# EAGLE board Multiple - Automatic Battery Charger (EAGLE 6.4)
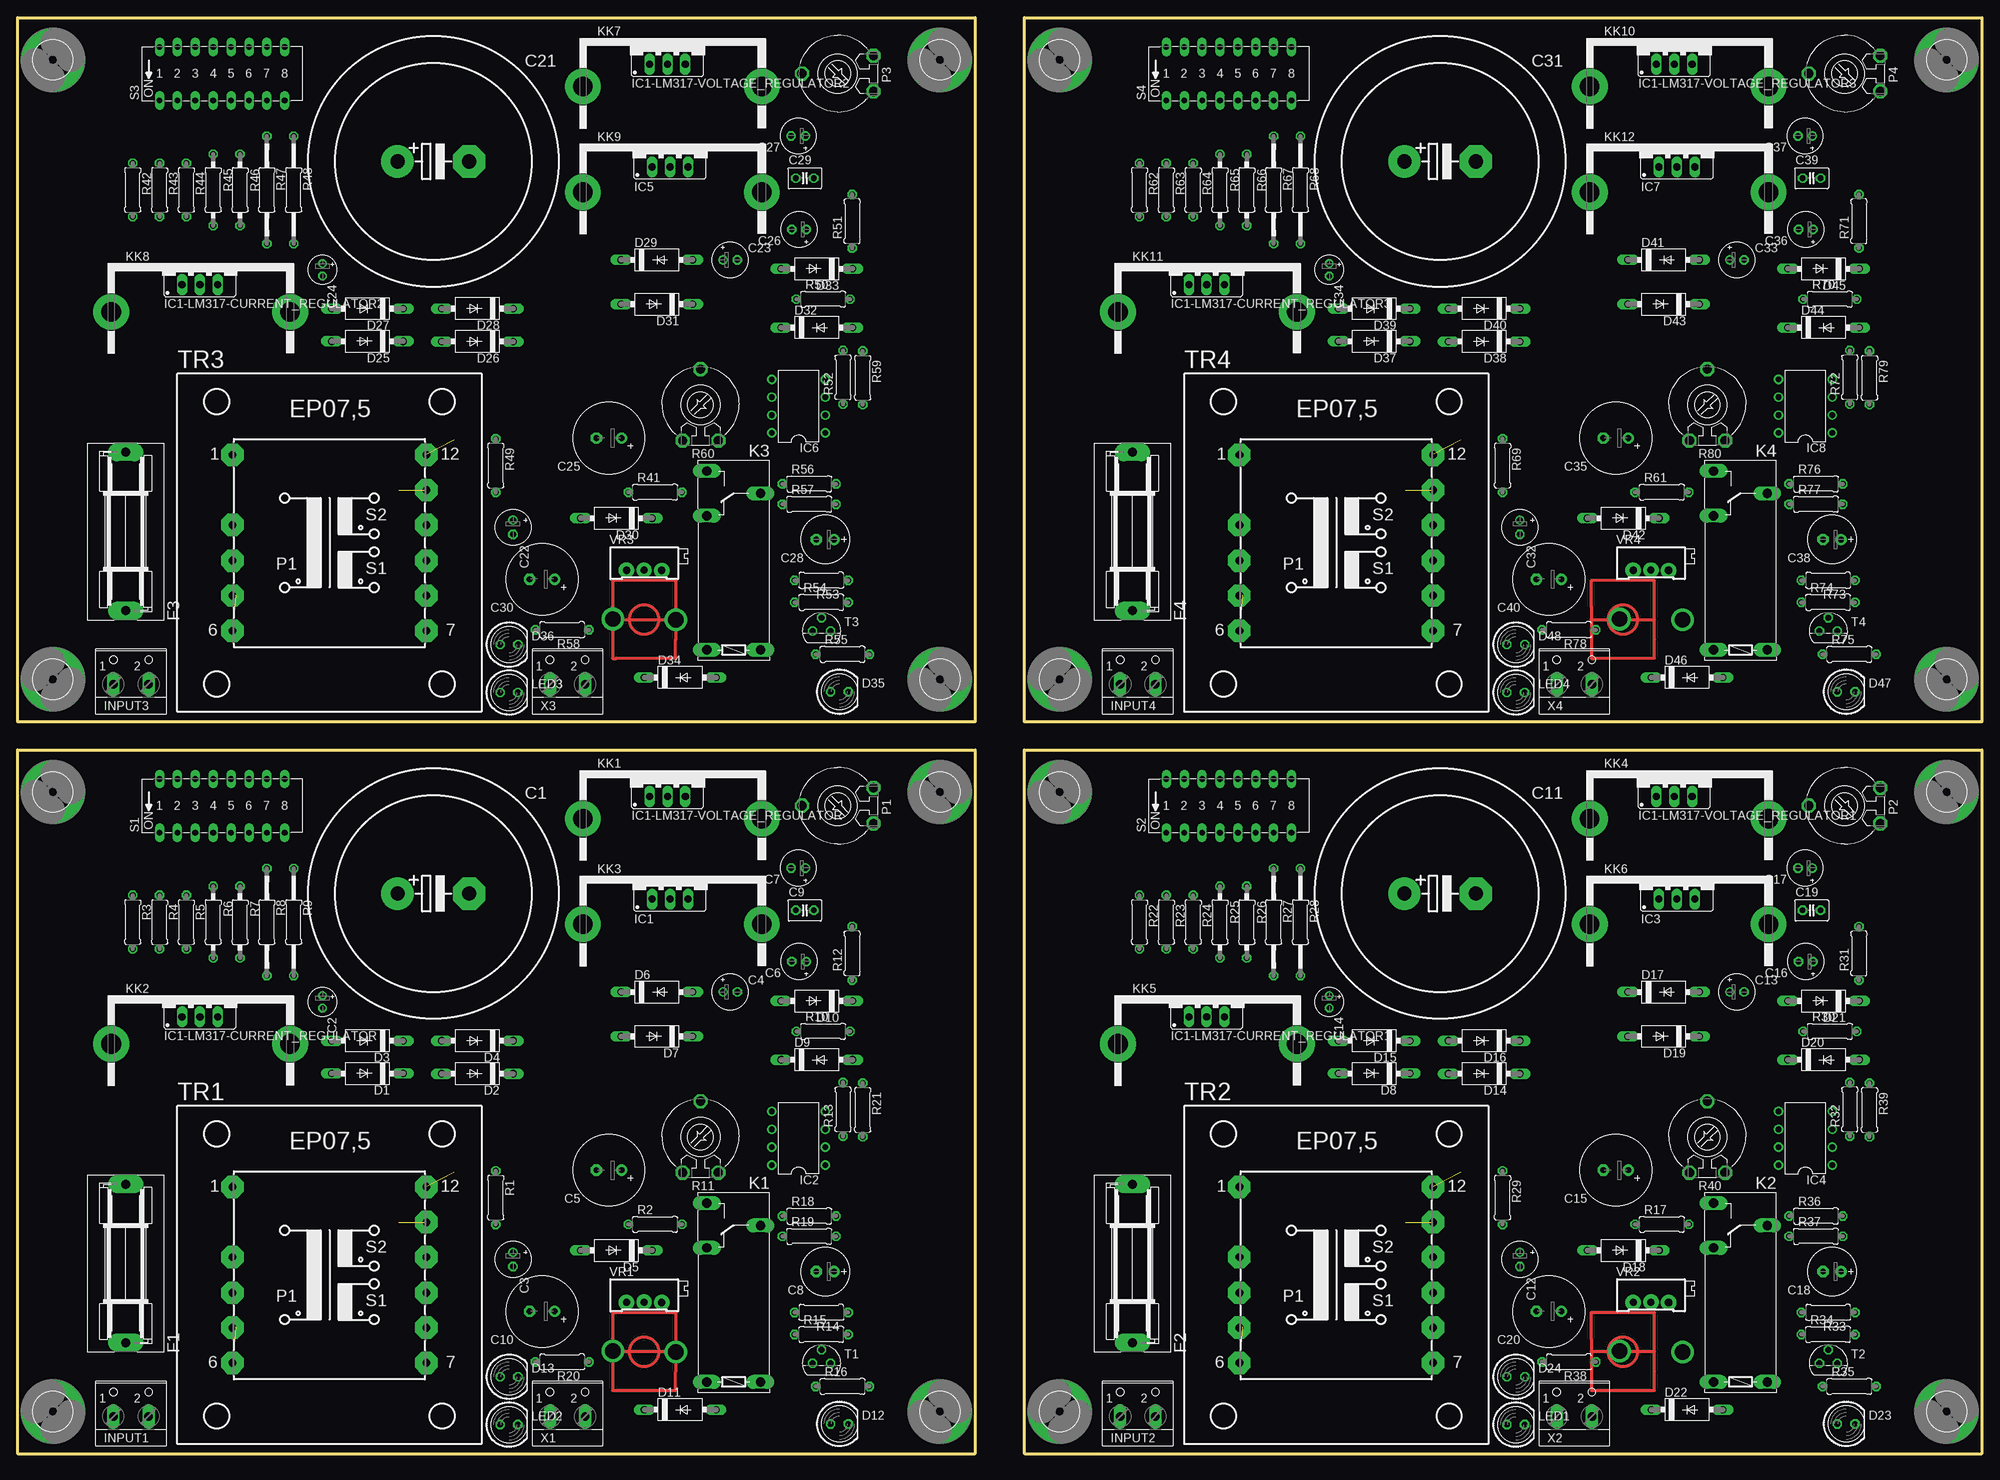
[diagram p0: board, top side]
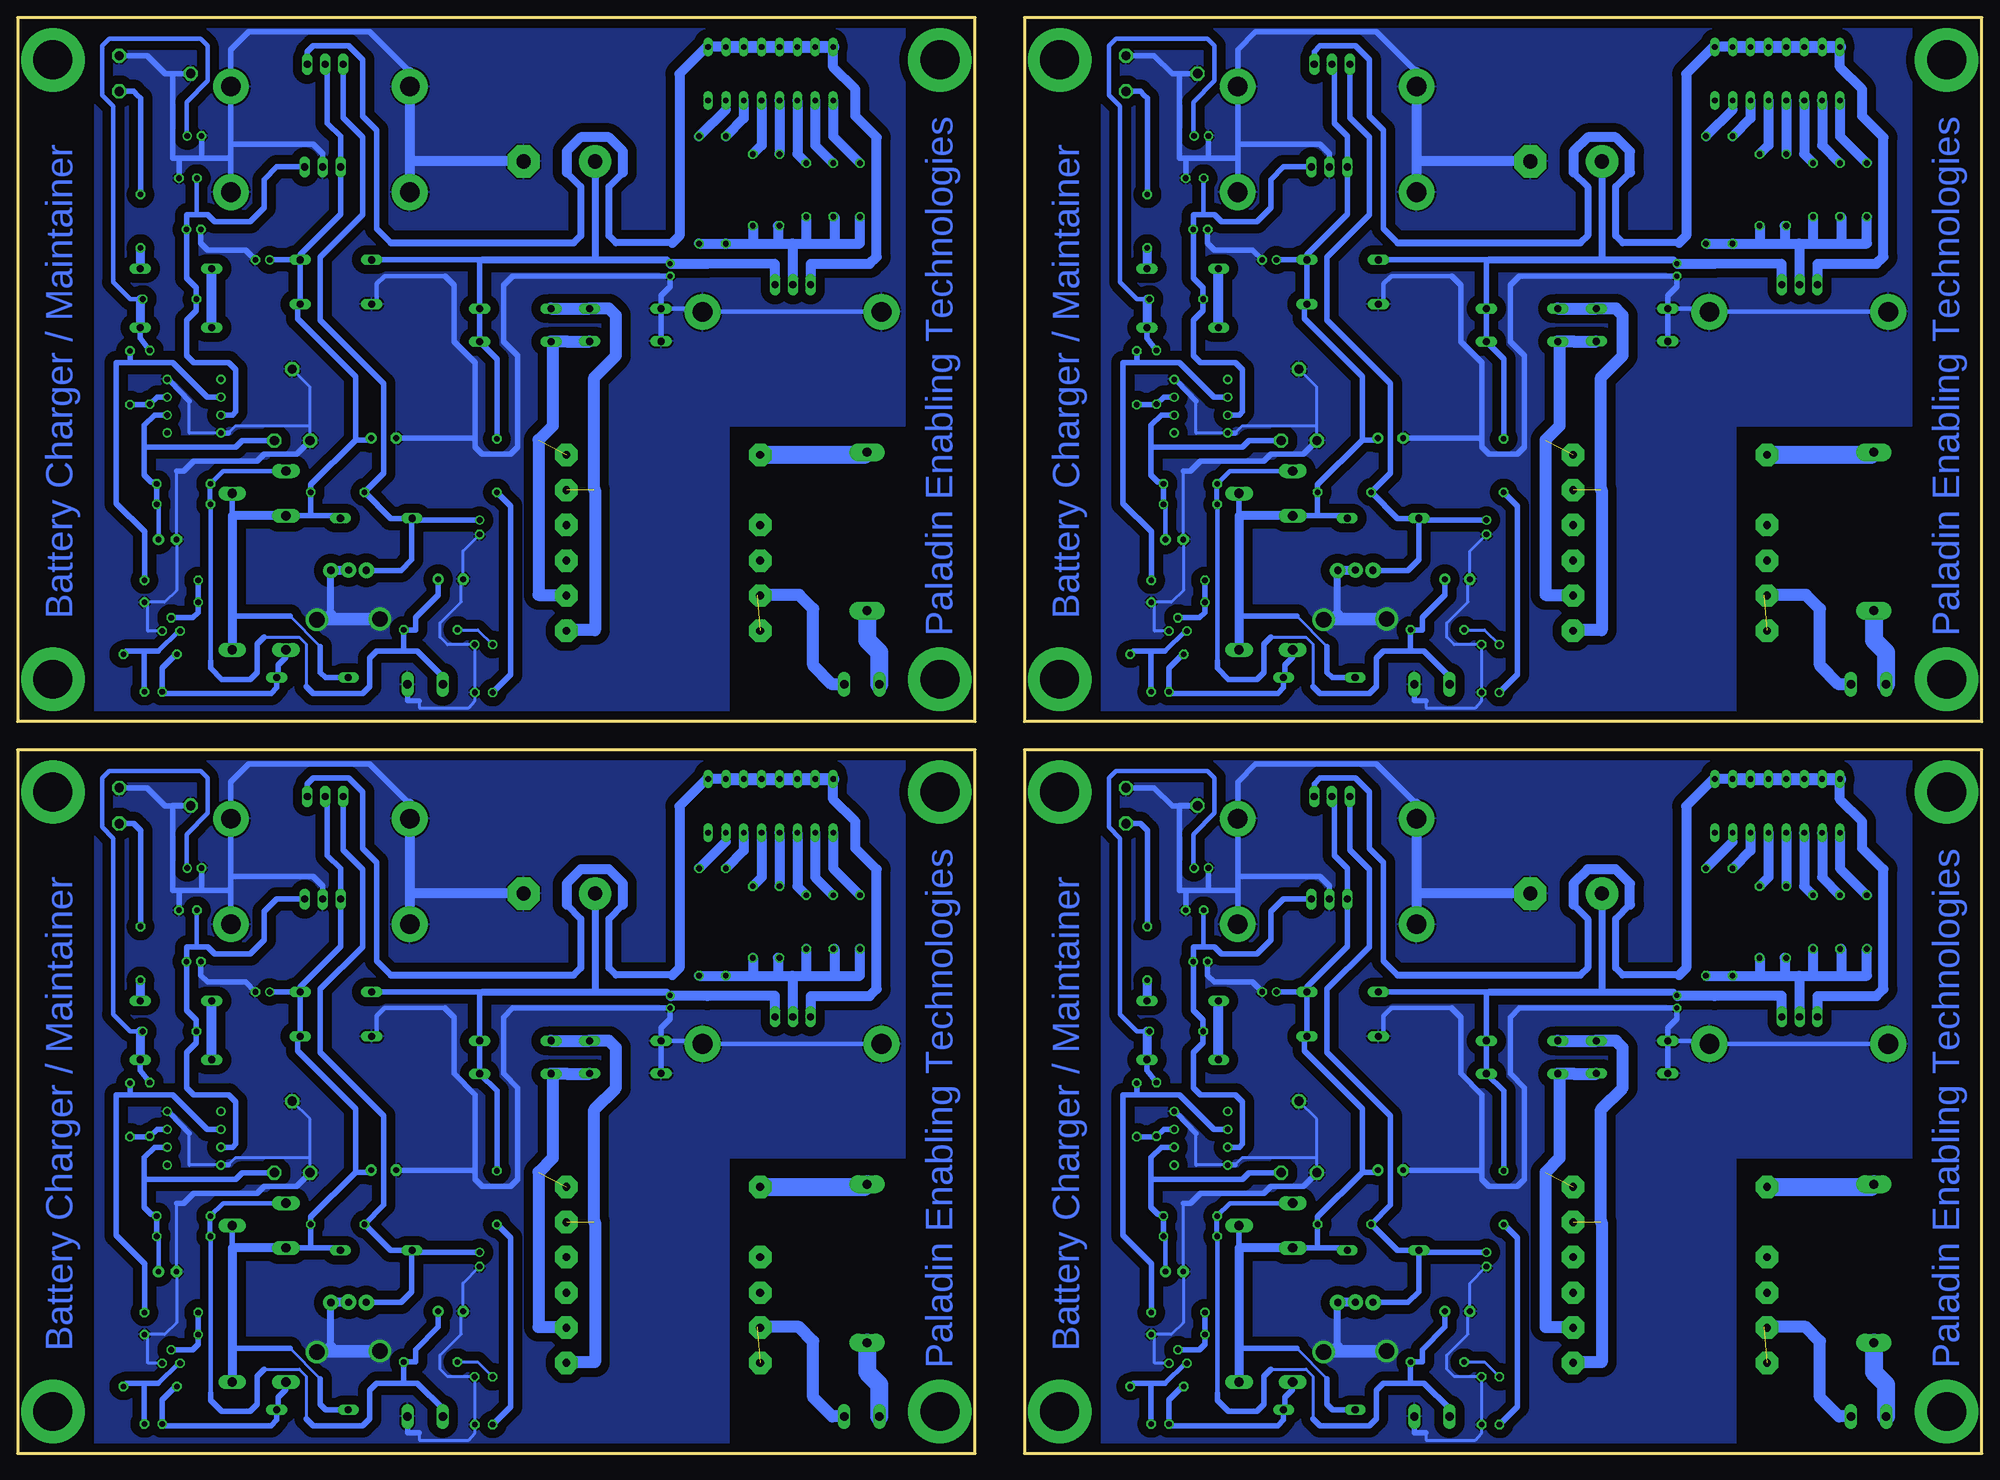
[diagram p1: board, bottom side, seen from below]

Size 279 x 204 mm. Coordinates in mm from the lower left corner, seen from the top.
Outline: 0,0 136,0 136,100 0,100 0,0
Outline: 143,0 279,0 279,100 143,100 143,0
Outline: 0,104 136,104 136,204 0,204 0,104
Outline: 143,104 279,104 279,204 143,204 143,104
Copper layers (1*16): Top 0.035mm / dielectric 1.5mm / Bottom 0.035mm
Design rules "default": minimum track width 10mil, minimum drill 24mil, track to track 8mil, track to pad 8mil, pad to pad 8mil, via to via 8mil, smd to smd 8mil, copper to edge 40mil, drill to drill 8mil, minimum pad ring 10mil, minimum via ring 8mil, stop-mask expansion 4mil, vias tented up to drill 0mil, thermal gap 10mil

## Footprints (pad centres in the part's own frame; a part is rotated, then mirrored left to right if it is on the bottom)
EB35D = drill 2.007 pad 4.597: + -5.08,0 | drill 2.007 pad 4.597 octagon: - 5.08,0
E1,8-4 = drill 0.711 pad 1.168: + -0.889,0 | drill 0.711 pad 1.168 octagon: - 0.889,0
E2-5 = drill 0.813 pad 1.27: + -1.016,0 | drill 0.813 pad 1.27 octagon: - 1.016,0
E3,5-10 = drill 0.813 pad 1.6: + -1.778,0 | drill 0.813 pad 1.6 octagon: - 1.778,0
E2,5-7 = drill 0.813 pad 1.6: + -1.27,0 | drill 0.813 pad 1.6 octagon: - 1.27,0
C025-030X050 = drill 0.813 octagon: 1 -1.27,0; 2 1.27,0
F126-10 = drill 1.016 long: A 5.08,0; C -5.08,0
LED5MM = drill 0.813 octagon: A -1.27,0; K 1.27,0
SH22,5A = drill 1.321 pad 2.54 long: 1 -11.252,0; 2 11.252,0
5,5-PAD = drill 5.5 pad 9: B5,5 0,0
78XXS = drill 1.016 long: GND 0,-2.54; IN -2.54,-2.54; OUT 2.54,-2.54
TO220S = drill 1.016 long: 1 -2.54,-2.54; 2 0,-2.54; 3 2.54,-2.54
DIL08 = drill 0.813 pad 1.27: 1 -3.81,-3.81; 2 -1.27,-3.81; 3 1.27,-3.81; 4 3.81,-3.81; 5 3.81,3.81; 6 1.27,3.81; 7 -1.27,3.81; 8 -3.81,3.81
W237-102 = drill 1.194 long: 1 -2.5,-1.27; 2 2.5,-1.27
G6RW = drill 1.321 long: 1 -12.7,-3.81; 2 -12.7,3.81; O 6.35,3.81; P 9.525,-3.81; S 12.7,3.81
FK222 = drill 2.794 pad 5.08: A2,8 5.791,-12.7; B2,8 5.791,12.7
LI10 = drill 1.321 octagon: A -2.54,-5.08; E 2.54,-5.08; S 0,5.08
0207/7 = drill 0.813 octagon: 1 -3.81,0; 2 3.81,0
0207/10 = drill 0.813 octagon: 1 -5.08,0; 2 5.08,0
0207/15 = drill 0.813 octagon: 1 -7.62,0; 2 7.62,0
DIP08SB = drill 0.813 long: 1 -8.89,-3.81; 2 -6.35,-3.81; 3 -3.81,-3.81; 4 -1.27,-3.81; 5 1.27,-3.81; 6 3.81,-3.81; 7 6.35,-3.81; 8 8.89,-3.81; 9 8.89,3.81; 10 6.35,3.81; 11 3.81,3.81; 12 1.27,3.81; 13 -1.27,3.81; 14 -3.81,3.81; 15 -6.35,3.81; 16 -8.89,3.81
TO92 = drill 0.813 octagon: 1 1.27,0; 2 0,1.905; 3 -1.27,0
EP07,5 = drill 1.118 pad 3.175 octagon: 1 -13.767,12.497; 3 -13.767,2.54; 4 -13.767,-2.54; 5 -13.767,-7.493; 6 -13.767,-12.497; 7 13.767,-12.497; 8 13.767,-7.493; 9 13.767,-2.54; 10 13.767,2.54; 11 13.767,7.493; 12 13.767,12.497
RTRIM64X = drill 0.61: 1 1.27,-2.54; 2 1.27,0; 3 1.27,2.54

## Placement (x,y rotation side)
C1  2200 Micro Farad - 100V  [EB35D]  59.05,79.57 0 top
C2  100 Nano Farad  [E1,8-4]  43.31,64.19 270 top
C3  10 Micro Farad  [E2-5]  70.37,27.6 270 top
C4  1 Micro Farad  [E2-5]  101.21,65.59 0 top
C5  470 Micro F - 25V  [E3,5-10]  84,40.27 180 top
C6  10 Micro F - 6.3V  [E2-5]  110.99,69.91 180 top
C7  10 Micro F - 6.3V  [E2-5]  110.89,83.19 180 top
C8  220 Micro F - 16 V  [E2,5-7]  114.7,25.87 180 top
C9  100nF  [C025-030X050]  111.81,77.19 0 top
C10  470 Micro F - 25 V  [E3,5-10]  74.5,20.22 180 top
C11  2200 Micro Farad - 100V  [EB35D]  202.05,79.57 0 top
C12  10 Micro Farad  [E2-5]  213.37,27.6 270 top
C13  1 Micro Farad  [E2-5]  244.21,65.59 0 top
C14  100 Nano Farad  [E1,8-4]  186.31,64.19 270 top
C15  470 Micro F - 25V  [E3,5-10]  227,40.27 180 top
C16  10 Micro F - 6.3V  [E2-5]  253.99,69.91 180 top
C17  10 Micro F - 6.3V  [E2-5]  253.88,83.19 180 top
C18  220 Micro F - 16 V  [E2,5-7]  257.7,25.87 180 top
C19  100nF  [C025-030X050]  254.81,77.19 0 top
C20  470 Micro F - 25 V  [E3,5-10]  217.5,20.22 180 top
C21  2200 Micro Farad - 100V  [EB35D]  59.05,183.57 0 top
C22  10 Micro Farad  [E2-5]  70.37,131.6 270 top
C23  1 Micro Farad  [E2-5]  101.21,169.59 0 top
C24  100 Nano Farad  [E1,8-4]  43.31,168.19 270 top
C25  470 Micro F - 25V  [E3,5-10]  84,144.27 180 top
C26  10 Micro F - 6.3V  [E2-5]  110.99,173.91 180 top
C27  10 Micro F - 6.3V  [E2-5]  110.89,187.19 180 top
C28  220 Micro F - 16 V  [E2,5-7]  114.7,129.87 180 top
C29  100nF  [C025-030X050]  111.81,181.19 0 top
C30  470 Micro F - 25 V  [E3,5-10]  74.5,124.22 180 top
C31  2200 Micro Farad - 100V  [EB35D]  202.05,183.57 0 top
C32  10 Micro Farad  [E2-5]  213.37,131.6 270 top
C33  1 Micro Farad  [E2-5]  244.21,169.59 0 top
C34  100 Nano Farad  [E1,8-4]  186.31,168.19 270 top
C35  470 Micro F - 25V  [E3,5-10]  227,144.27 180 top
C36  10 Micro F - 6.3V  [E2-5]  253.99,173.91 180 top
C37  10 Micro F - 6.3V  [E2-5]  253.88,187.19 180 top
C38  220 Micro F - 16 V  [E2,5-7]  257.7,129.87 180 top
C39  100nF  [C025-030X050]  254.81,181.19 0 top
C40  470 Micro F - 25 V  [E3,5-10]  217.5,124.22 180 top
D1  BYT01  [F126-10]  49.69,54.01 180 top
D2  BYT01  [F126-10]  65.31,53.99 180 top
D3  BYT01  [F126-10]  49.69,58.66 180 top
D4  BYT01  [F126-10]  65.31,58.67 180 top
D5  BYT01  [F126-10]  85.06,28.88 180 top
D6  BYT01  [F126-10]  90.79,65.58 0 top
D7  BYT01  [F126-10]  90.8,59.28 180 top
D8  BYT01  [F126-10]  192.69,54.01 180 top
D9  BYT01  [F126-10]  113.5,55.97 0 top
D10  BYT01  [F126-10]  113.5,64.32 180 top
D11  BYT01  [F126-10]  94.11,6.26 0 top
D12  [LED5MM]  116.73,4.24 0 top
D13  [LED5MM]  69.81,10.94 0 top
D14  BYT01  [F126-10]  208.31,53.99 180 top
D15  BYT01  [F126-10]  192.69,58.66 180 top
D16  BYT01  [F126-10]  208.31,58.67 180 top
D17  BYT01  [F126-10]  233.79,65.58 0 top
D18  BYT01  [F126-10]  228.06,28.88 180 top
D19  BYT01  [F126-10]  233.8,59.28 180 top
D20  BYT01  [F126-10]  256.5,55.97 0 top
D21  BYT01  [F126-10]  256.5,64.32 180 top
D22  BYT01  [F126-10]  237.11,6.26 0 top
D23  [LED5MM]  259.73,4.24 0 top
D24  [LED5MM]  212.81,10.94 0 top
D25  BYT01  [F126-10]  49.69,158.01 180 top
D26  BYT01  [F126-10]  65.31,157.99 180 top
D27  BYT01  [F126-10]  49.69,162.66 180 top
D28  BYT01  [F126-10]  65.31,162.67 180 top
D29  BYT01  [F126-10]  90.79,169.58 0 top
D30  BYT01  [F126-10]  85.06,132.88 180 top
D31  BYT01  [F126-10]  90.8,163.28 180 top
D32  BYT01  [F126-10]  113.5,159.97 0 top
D33  BYT01  [F126-10]  113.5,168.32 180 top
D34  BYT01  [F126-10]  94.11,110.26 0 top
D35  [LED5MM]  116.73,108.24 0 top
D36  [LED5MM]  69.81,114.94 0 top
D37  BYT01  [F126-10]  192.69,158.01 180 top
D38  BYT01  [F126-10]  208.31,157.99 180 top
D39  BYT01  [F126-10]  192.69,162.66 180 top
D40  BYT01  [F126-10]  208.31,162.67 180 top
D41  BYT01  [F126-10]  233.79,169.58 0 top
D42  BYT01  [F126-10]  228.06,132.88 180 top
D43  BYT01  [F126-10]  233.8,163.28 180 top
D44  BYT01  [F126-10]  256.5,159.97 0 top
D45  BYT01  [F126-10]  256.5,168.32 180 top
D46  BYT01  [F126-10]  237.11,110.26 0 top
D47  [LED5MM]  259.73,108.24 0 top
D48  [LED5MM]  212.81,114.94 0 top
F1  [SH22,5A]  15.35,27.02 90 top
F2  [SH22,5A]  158.35,27.02 90 top
F3  [SH22,5A]  15.35,131.02 90 top
F4  [SH22,5A]  158.35,131.02 90 top
H1  MOUNT-PAD-ROUND5.5  [5,5-PAD]  5,6 90 top
H2  MOUNT-PAD-ROUND5.5  [5,5-PAD]  5,94 0 top
H3  MOUNT-PAD-ROUND5.5  [5,5-PAD]  131,6 0 top
H4  MOUNT-PAD-ROUND5.5  [5,5-PAD]  131,94 0 top
H5  MOUNT-PAD-ROUND5.5  [5,5-PAD]  148,6 90 top
H6  MOUNT-PAD-ROUND5.5  [5,5-PAD]  148,94 0 top
H7  MOUNT-PAD-ROUND5.5  [5,5-PAD]  274,6 0 top
H8  MOUNT-PAD-ROUND5.5  [5,5-PAD]  274,94 0 top
H9  MOUNT-PAD-ROUND5.5  [5,5-PAD]  5,110 90 top
H10  MOUNT-PAD-ROUND5.5  [5,5-PAD]  5,198 0 top
H11  MOUNT-PAD-ROUND5.5  [5,5-PAD]  131,110 0 top
H12  MOUNT-PAD-ROUND5.5  [5,5-PAD]  131,198 0 top
H13  MOUNT-PAD-ROUND5.5  [5,5-PAD]  148,110 90 top
H14  MOUNT-PAD-ROUND5.5  [5,5-PAD]  148,198 0 top
H15  MOUNT-PAD-ROUND5.5  [5,5-PAD]  274,110 0 top
H16  MOUNT-PAD-ROUND5.5  [5,5-PAD]  274,198 0 top
IC1  7805  [78XXS]  92.67,81.33 0 top
IC1-LM317-CURRENT_REGULATOR  [TO220S]  25.89,64.61 0 top
IC1-LM317-CURRENT_REGULATOR1  [TO220S]  168.89,64.61 0 top
IC1-LM317-CURRENT_REGULATOR2  [TO220S]  25.89,168.61 0 top
IC1-LM317-CURRENT_REGULATOR3  [TO220S]  168.89,168.61 0 top
IC1-LM317-VOLTAGE_REGULATOR  [TO220S]  92.3,95.9 0 top
IC1-LM317-VOLTAGE_REGULATOR1  [TO220S]  235.3,95.9 0 top
IC1-LM317-VOLTAGE_REGULATOR2  [TO220S]  92.3,199.9 0 top
IC1-LM317-VOLTAGE_REGULATOR3  [TO220S]  235.3,199.9 0 top
IC2  TLC271P  [DIL08]  110.93,44.81 90 top
IC3  7805  [78XXS]  235.67,81.33 0 top
IC4  TLC271P  [DIL08]  253.93,44.81 90 top
IC5  7805  [78XXS]  92.67,185.33 0 top
IC6  TLC271P  [DIL08]  110.93,148.81 90 top
IC7  7805  [78XXS]  235.67,185.33 0 top
IC8  TLC271P  [DIL08]  253.93,148.81 90 top
INPUT1  [W237-102]  16.1,6.57 0 top
INPUT2  [W237-102]  159.1,6.57 0 top
INPUT3  [W237-102]  16.1,110.57 0 top
INPUT4  [W237-102]  159.1,110.57 0 top
K1  G6RW  [G6RW]  101.71,22.89 90 top
K2  G6RW  [G6RW]  244.71,22.89 90 top
K3  G6RW  [G6RW]  101.71,126.89 90 top
K4  G6RW  [G6RW]  244.71,126.89 90 top
KK1  FK222  [FK222]  93,96 270 top
KK2  FK222  [FK222]  26,64 270 top
KK3  FK222  [FK222]  93,81 270 top
KK4  FK222  [FK222]  236,96 270 top
KK5  FK222  [FK222]  169,64 270 top
KK6  FK222  [FK222]  236,81 270 top
KK7  FK222  [FK222]  93,200 270 top
KK8  FK222  [FK222]  26,168 270 top
KK9  FK222  [FK222]  93,185 270 top
KK10  FK222  [FK222]  236,200 270 top
KK11  FK222  [FK222]  169,168 270 top
KK12  FK222  [FK222]  236,185 270 top
LED1  [LED5MM]  212.79,4.14 0 top
LED2  [LED5MM]  69.79,4.14 0 top
LED3  [LED5MM]  69.79,108.14 0 top
LED4  [LED5MM]  212.79,108.14 0 top
P1  22 k  [LI10]  116.48,92.05 90 top
P2  22 k  [LI10]  259.49,92.05 90 top
P3  22 k  [LI10]  116.48,196.05 90 top
P4  22 k  [LI10]  259.49,196.05 90 top
R1  1K  [0207/7]  67.92,36.37 270 top
R2  240  [0207/7]  90.55,32.58 0 top
R3  1K  [0207/7]  16.35,75.52 270 top
R4  1K  [0207/7]  20.16,75.52 270 top
R5  1K  [0207/7]  23.97,75.52 270 top
R6  1K  [0207/10]  27.78,75.52 270 top
R7  1K  [0207/10]  31.59,75.52 270 top
R8  1K  [0207/15]  35.4,75.52 270 top
R9  1K  [0207/15]  39.21,75.52 270 top
R10  2k7  [0207/7]  114.42,60 0 top
R11  47 k  [LI10]  97,45 0 top
R12  680  [0207/7]  118.54,71.08 90 top
R13  22  [0207/7]  117.24,48.91 90 top
R14  10k  [0207/7]  114.16,20.07 180 top
R15  5k6  [0207/7]  114.16,16.94 0 top
R16  82  [0207/7]  117.17,9.56 0 top
R17  240  [0207/7]  233.55,32.58 0 top
R18  100k  [0207/7]  112.44,33.76 0 top
R19  100k  [0207/7]  112.44,30.88 0 top
R20  10k  [0207/7]  77.34,13.04 180 top
R21  15k  [0207/7]  120.04,48.84 270 top
R22  1K  [0207/7]  159.35,75.52 270 top
R23  1K  [0207/7]  163.16,75.52 270 top
R24  1K  [0207/7]  166.97,75.52 270 top
R25  1K  [0207/10]  170.78,75.52 270 top
R26  1K  [0207/10]  174.59,75.52 270 top
R27  1K  [0207/15]  178.4,75.52 270 top
R28  1K  [0207/15]  182.21,75.52 270 top
R29  1K  [0207/7]  210.92,36.37 270 top
R30  2k7  [0207/7]  257.42,60 0 top
R31  680  [0207/7]  261.54,71.08 90 top
R32  22  [0207/7]  260.24,48.91 90 top
R33  10k  [0207/7]  257.16,20.07 180 top
R34  5k6  [0207/7]  257.16,16.94 0 top
R35  82  [0207/7]  260.17,9.56 0 top
R36  100k  [0207/7]  255.44,33.76 0 top
R37  100k  [0207/7]  255.44,30.88 0 top
R38  10k  [0207/7]  220.34,13.04 180 top
R39  15k  [0207/7]  263.04,48.84 270 top
R40  47 k  [LI10]  240,45 0 top
R41  240  [0207/7]  90.55,136.58 0 top
R42  1K  [0207/7]  16.35,179.52 270 top
R43  1K  [0207/7]  20.16,179.52 270 top
R44  1K  [0207/7]  23.97,179.52 270 top
R45  1K  [0207/10]  27.78,179.52 270 top
R46  1K  [0207/10]  31.59,179.52 270 top
R47  1K  [0207/15]  35.4,179.52 270 top
R48  1K  [0207/15]  39.21,179.52 270 top
R49  1K  [0207/7]  67.92,140.37 270 top
R50  2k7  [0207/7]  114.42,164 0 top
R51  680  [0207/7]  118.54,175.08 90 top
R52  22  [0207/7]  117.24,152.91 90 top
R53  10k  [0207/7]  114.16,124.07 180 top
R54  5k6  [0207/7]  114.16,120.94 0 top
R55  82  [0207/7]  117.17,113.56 0 top
R56  100k  [0207/7]  112.44,137.76 0 top
R57  100k  [0207/7]  112.44,134.88 0 top
R58  10k  [0207/7]  77.34,117.04 180 top
R59  15k  [0207/7]  120.04,152.84 270 top
R60  47 k  [LI10]  97,149 0 top
R61  240  [0207/7]  233.55,136.58 0 top
R62  1K  [0207/7]  159.35,179.52 270 top
R63  1K  [0207/7]  163.16,179.52 270 top
R64  1K  [0207/7]  166.97,179.52 270 top
R65  1K  [0207/10]  170.78,179.52 270 top
R66  1K  [0207/10]  174.59,179.52 270 top
R67  1K  [0207/15]  178.4,179.52 270 top
R68  1K  [0207/15]  182.21,179.52 270 top
R69  1K  [0207/7]  210.92,140.37 270 top
R70  2k7  [0207/7]  257.42,164 0 top
R71  680  [0207/7]  261.54,175.08 90 top
R72  22  [0207/7]  260.24,152.91 90 top
R73  10k  [0207/7]  257.16,124.07 180 top
R74  5k6  [0207/7]  257.16,120.94 0 top
R75  82  [0207/7]  260.17,113.56 0 top
R76  100k  [0207/7]  255.44,137.76 0 top
R77  100k  [0207/7]  255.44,134.88 0 top
R78  10k  [0207/7]  220.34,117.04 180 top
R79  15k  [0207/7]  263.04,152.84 270 top
R80  47 k  [LI10]  240,149 0 top
S1  [DIP08SB]  29.05,92.03 0 top
S2  [DIP08SB]  172.05,92.03 0 top
S3  [DIP08SB]  29.05,196.03 0 top
S4  [DIP08SB]  172.05,196.03 0 top
T1  BC337  [TO92]  114.19,12.85 0 top
T2  BC337  [TO92]  257.19,12.85 0 top
T3  BC337  [TO92]  114.19,116.85 0 top
T4  BC337  [TO92]  257.19,116.85 0 top
TR1  EP07,5  [EP07,5]  44.29,25.4 0 top
TR2  EP07,5  [EP07,5]  187.29,25.4 0 top
TR3  EP07,5  [EP07,5]  44.29,129.4 0 top
TR4  EP07,5  [EP07,5]  187.29,129.4 0 top
VR1  5K  [RTRIM64X]  89,22.75 270 top
VR2  5K  [RTRIM64X]  232,22.75 270 top
VR3  5K  [RTRIM64X]  89,126.75 270 top
VR4  5K  [RTRIM64X]  232,126.75 270 top
X1  [W237-102]  78.11,6.56 0 top
X2  [W237-102]  221.11,6.56 0 top
X3  [W237-102]  78.11,110.56 0 top
X4  [W237-102]  221.11,110.56 0 top

## Library data of the parts
C1-C40 R1-R10 R12-R39 R41-R59 R61-R79 = rcl
D1-D11 D14-D22 D25-D34 D37-D46 = diode
D12 D13 D23 D24 D35 D36 D47 D48 LED1-LED4 = led
F1-F4 = fuse; MPN: 0031.7701.11; OC_FARNELL: unknown; OC_NEWARK: 04F1224
H1-H16 = holes
IC1 IC1-LM317-CURRENT_REGULATOR IC1-LM317-CURRENT_REGULATOR1-IC1-LM317-CURRENT_REGULATOR3 IC1-LM317-VOLTAGE_REGULATOR IC1-LM317-VOLTAGE_REGULATOR1-IC1-LM317-VOLTAGE_REGULATOR3 IC3 IC5 IC7 = v-reg
IC2 IC4 IC6 IC8 = linear
INPUT1-INPUT4 X1-X4 = con-wago-500; MPN: 237-102; OC_FARNELL: unknown; OC_NEWARK: 70K9898
K1-K4 = relay; OC_FARNELL: unknown; OC_NEWARK: unknown
KK1-KK12 = heatsink
P1-P4 R11 R40 R60 R80 = pot
S1-S4 = switch-dil; OC_FARNELL: unknown; OC_NEWARK: unknown
T1-T4 = transistor
TR1-TR4 = trafo
VR1-VR4 = resistor

## Nets
GND: C1.- C2.- C3.- C4.- C5.- C6.- C7.- C8.- C9.2 C10.- D1.A D3.A D7.A D13.K IC1.GND IC2.4 IC2.8 KK1.A2,8 KK1.B2,8 KK2.A2,8 KK2.B2,8 KK3.A2,8 KK3.B2,8 LED2.K P1.E P1.S R11.A R11.S R15.2 T1.1 VR1.2 VR1.3 X1.2
GND1: C11.- C12.- C13.- C14.- C15.- C16.- C17.- C18.- C19.2 C20.- D8.A D15.A D19.A D24.K IC3.GND IC4.4 IC4.8 KK4.A2,8 KK4.B2,8 KK5.A2,8 KK5.B2,8 KK6.A2,8 KK6.B2,8 LED1.K P2.E P2.S R34.2 R40.A R40.S T2.1 VR2.2 VR2.3 X2.2
GND2: C21.- C22.- C23.- C24.- C25.- C26.- C27.- C28.- C29.2 C30.- D25.A D27.A D31.A D36.K IC5.GND IC6.4 IC6.8 KK7.A2,8 KK7.B2,8 KK8.A2,8 KK8.B2,8 KK9.A2,8 KK9.B2,8 LED3.K P3.E P3.S R54.2 R60.A R60.S T3.1 VR3.2 VR3.3 X3.2
GND3: C31.- C32.- C33.- C34.- C35.- C36.- C37.- C38.- C39.2 C40.- D37.A D39.A D43.A D48.K IC7.GND IC8.4 IC8.8 KK10.A2,8 KK10.B2,8 KK11.A2,8 KK11.B2,8 KK12.A2,8 KK12.B2,8 LED4.K P4.E P4.S R74.2 R80.A R80.S T4.1 VR4.2 VR4.3 X4.2
N$3: C3.+ D5.A IC1-LM317-VOLTAGE_REGULATOR.1 R2.1 VR1.1
N$4: D1.C D2.A TR1.12
N$5: D3.C D4.A TR1.11
N$6: R3.1 S1.1
N$7: R4.1 S1.2
N$8: R5.1 S1.3
N$9: INPUT1.2 TR1.6
N$10: LED2.A R1.2
N$11: R6.1 S1.4
N$13: F1.2 TR1.1
N$14: R7.1 S1.5
N$15: R8.1 S1.6
N$16: R9.1 S1.7
N$17: C4.+ C5.+ D5.C D6.A D7.C D11.C IC1-LM317-VOLTAGE_REGULATOR.2 IC1.IN K1.1 K1.O K1.P R2.2
N$18: IC1-LM317-CURRENT_REGULATOR.2 R3.2 R4.2 R5.2 R6.2 R7.2 R8.2 R9.2
N$19: F1.1 INPUT1.1
N$20: IC1-LM317-CURRENT_REGULATOR.1 IC1-LM317-VOLTAGE_REGULATOR.3 S1.10 S1.11 S1.12 S1.13 S1.14 S1.15 S1.16
N$21: C6.+ C9.1 IC1.OUT IC2.7 R10.1
N$23: C7.+ D9.A R10.2 R13.2
N$24: D9.C D10.A
N$25: D10.C R12.1
N$26: P1.A R12.2
N$28: C1.+ C2.+ D2.C D4.C D6.C IC1-LM317-CURRENT_REGULATOR.3 R1.1
N$29: IC2.3 R13.1 R21.2
N$30: IC2.6 R14.1 R21.1
N$31: R14.2 R15.1 T1.2
N$32: D12.K R16.2 T1.3
N$33: D11.A D12.A K1.2 R16.1
N$34: C10.+ K1.S R18.1 R19.1 R20.1 X1.1
N$35: C8.+ IC2.2 R11.E R18.2 R19.2
N$36: D13.A R20.2
N$41: D8.C D14.A TR2.12
N$42: D15.C D16.A TR2.11
N$43: C12.+ D18.A IC1-LM317-VOLTAGE_REGULATOR1.1 R17.1 VR2.1
N$44: C11.+ C14.+ D14.C D16.C D17.C IC1-LM317-CURRENT_REGULATOR1.3 R29.1
N$45: INPUT2.2 TR2.6
N$46: F2.2 TR2.1
N$47: F2.1 INPUT2.1
N$48: R22.1 S2.1
N$49: R23.1 S2.2
N$50: R24.1 S2.3
N$51: R25.1 S2.4
N$52: R26.1 S2.5
N$53: R27.1 S2.6
N$54: R28.1 S2.7
N$55: IC1-LM317-CURRENT_REGULATOR1.2 R22.2 R23.2 R24.2 R25.2 R26.2 R27.2 R28.2
N$56: IC1-LM317-CURRENT_REGULATOR1.1 IC1-LM317-VOLTAGE_REGULATOR1.3 S2.10 S2.11 S2.12 S2.13 S2.14 S2.15 S2.16
N$57: LED1.A R29.2
N$58: C16.+ C19.1 IC3.OUT IC4.7 R30.1
N$59: C17.+ D20.A R30.2 R32.2
N$60: D20.C D21.A
N$61: D21.C R31.1
N$62: P2.A R31.2
N$63: IC4.3 R32.1 R39.2
N$64: IC4.6 R33.1 R39.1
N$65: R33.2 R34.1 T2.2
N$66: D23.K R35.2 T2.3
N$67: D22.A D23.A K2.2 R35.1
N$68: C20.+ K2.S R36.1 R37.1 R38.1 X2.1
N$69: C18.+ IC4.2 R36.2 R37.2 R40.E
N$70: D24.A R38.2
N$71: C13.+ C15.+ D17.A D18.C D19.C D22.C IC1-LM317-VOLTAGE_REGULATOR1.2 IC3.IN K2.1 K2.O K2.P R17.2
N$80: D25.C D26.A TR3.12
N$81: D27.C D28.A TR3.11
N$82: C22.+ D30.A IC1-LM317-VOLTAGE_REGULATOR2.1 R41.1 VR3.1
N$83: C21.+ C24.+ D26.C D28.C D29.C IC1-LM317-CURRENT_REGULATOR2.3 R49.1
N$84: INPUT3.2 TR3.6
N$85: F3.2 TR3.1
N$86: F3.1 INPUT3.1
N$87: R42.1 S3.1
N$88: R43.1 S3.2
N$89: R44.1 S3.3
N$90: R45.1 S3.4
N$91: R46.1 S3.5
N$92: R47.1 S3.6
N$93: R48.1 S3.7
N$94: IC1-LM317-CURRENT_REGULATOR2.2 R42.2 R43.2 R44.2 R45.2 R46.2 R47.2 R48.2
N$95: IC1-LM317-CURRENT_REGULATOR2.1 IC1-LM317-VOLTAGE_REGULATOR2.3 S3.10 S3.11 S3.12 S3.13 S3.14 S3.15 S3.16
N$96: LED3.A R49.2
N$97: C26.+ C29.1 IC5.OUT IC6.7 R50.1
N$98: C27.+ D32.A R50.2 R52.2
N$99: D32.C D33.A
N$100: D33.C R51.1
N$101: P3.A R51.2
N$102: IC6.3 R52.1 R59.2
N$103: IC6.6 R53.1 R59.1
N$104: R53.2 R54.1 T3.2
N$105: D35.K R55.2 T3.3
N$106: D34.A D35.A K3.2 R55.1
N$107: C30.+ K3.S R56.1 R57.1 R58.1 X3.1
N$108: C28.+ IC6.2 R56.2 R57.2 R60.E
N$109: D36.A R58.2
N$110: C23.+ C25.+ D29.A D30.C D31.C D34.C IC1-LM317-VOLTAGE_REGULATOR2.2 IC5.IN K3.1 K3.O K3.P R41.2
N$119: D37.C D38.A TR4.12
N$120: D39.C D40.A TR4.11
N$121: C32.+ D42.A IC1-LM317-VOLTAGE_REGULATOR3.1 R61.1 VR4.1
N$122: C31.+ C34.+ D38.C D40.C D41.C IC1-LM317-CURRENT_REGULATOR3.3 R69.1
N$123: INPUT4.2 TR4.6
N$124: F4.2 TR4.1
N$125: F4.1 INPUT4.1
N$126: R62.1 S4.1
N$127: R63.1 S4.2
N$128: R64.1 S4.3
N$129: R65.1 S4.4
N$130: R66.1 S4.5
N$131: R67.1 S4.6
N$132: R68.1 S4.7
N$133: IC1-LM317-CURRENT_REGULATOR3.2 R62.2 R63.2 R64.2 R65.2 R66.2 R67.2 R68.2
N$134: IC1-LM317-CURRENT_REGULATOR3.1 IC1-LM317-VOLTAGE_REGULATOR3.3 S4.10 S4.11 S4.12 S4.13 S4.14 S4.15 S4.16
N$135: LED4.A R69.2
N$136: C36.+ C39.1 IC7.OUT IC8.7 R70.1
N$137: C37.+ D44.A R70.2 R72.2
N$138: D44.C D45.A
N$139: D45.C R71.1
N$140: P4.A R71.2
N$141: IC8.3 R72.1 R79.2
N$142: IC8.6 R73.1 R79.1
N$143: R73.2 R74.1 T4.2
N$144: D47.K R75.2 T4.3
N$145: D46.A D47.A K4.2 R75.1
N$146: C40.+ K4.S R76.1 R77.1 R78.1 X4.1
N$147: C38.+ IC8.2 R76.2 R77.2 R80.E
N$148: D48.A R78.2
N$149: C33.+ C35.+ D41.A D42.C D43.C D46.C IC1-LM317-VOLTAGE_REGULATOR3.2 IC7.IN K4.1 K4.O K4.P R61.2

## Tracks (layer width: path | path; a pad name or v marks a point on that pad's centre or on a via)
GND  (via drill 2.2)
  Bottom 0.406: 71.08,4.15 D13.K 74.94,10.94 76,12 76,14 73,17 73,19.94 C10.- 72.72,24.23 C3.- | 71.08,4.15 LED2.K | 71.08,4.15 71.08,2.92 71.97,1.94 78.96,1.93 78.96,2.94 | 80.59,5.28 X1.2 | 117.5,16.95 115.11,16.95 113.43,18.63 C8.- 113.43,35.57 | 117.5,16.95 R15.2 | T1.1 117.5,12.85 117.5,16.95 | IC2.8 111.58,41 111.62,40.95 111.62,45.5 | VR1.2 | R11.S 94.46,47.54 R11.A 94.46,42 105.08,42 106.08,41
  Bottom 0.61: VR1.2 88.98,21.48 | D3.A 39.15,58.66 KK2.B2,8 KK2.A2,8 | D7.A 85,59.28 85,62.19 83.89,63.3 75.3,63.3
  Bottom 0.813: D1.A D3.A 44.61,60.48 43.31,61.78 C2.- 65.7,63.3 67,62 67,54 65,52 65,39 66,38 70,38 71,39 71,40 | 111.62,45.5 114.24,48.31 114.56,48.62 IC2.4 | 78.96,2.94 80.61,2.98 X1.2 | 105.66,75.17 KK3.B2,8 105.7,80 106,80 | C9.2 113.08,79.92 113,80 | 110,80 106,80 | C7.- 109.87,80.13 110,80 | 113,80 114,80 114,92.05 P1.S 111.46,92 115,92 117.59,94.59 P1.E | 113,80 110,80 | C6.- 109.97,67.97 109,67 103.64,67 C4.- | KK1.A2,8 80.3,84 80.17,84.13 | 105.7,82 KK1.B2,8 105.7,95.45 103.16,98 86,98 80.3,92.3 | 105.7,82 105.7,80.3 106,80 | IC1.GND 92.67,80.67 94,82 105.7,82 | 71,40 71,51 74,54 74,62 75,63 75.11,63.1 75.25,63.24 75.3,63.3 | C5.- 71.27,40.27 71,40 | IC2.8 106.08,41 | 113.43,35.57 112.43,35.57 111,37 102,37 101,38 96.38,38 R11.A
  Bottom 1.016: 91.54,15.03 VR1.3
  Bottom 1.27: VR1.2 VR1.3
  Bottom 1.422: C1.- 80.3,79.57 KK3.A2,8 KK1.A2,8 80.3,92.3
  Bottom 1.778: v84.56,14.57 92,14.57 | 92,14.57 93.38,14.57 v93.49,14.46 | 91.54,15.03 92,14.57
  pour Bottom (isolate 1.27): 35,0 125,0 125,100 10,100 10,42 35,42
GND1  (via drill 2.2)
  Bottom 0.406: 214.08,4.15 D24.K 217.94,10.94 219,12 219,14 216,17 216,19.94 C20.- 215.72,24.23 C12.- | 214.08,4.15 LED1.K | 214.08,4.15 214.08,2.92 214.97,1.94 221.96,1.93 221.96,2.94 | 223.59,5.28 X2.2 | 260.5,16.95 258.11,16.95 256.43,18.63 C18.- 256.43,35.57 | 260.5,16.95 R34.2 | T2.1 260.5,12.85 260.5,16.95 | IC4.8 254.58,41 254.62,40.95 254.62,45.5 | VR2.2 | R40.S 237.46,47.54 R40.A 237.46,42 248.08,42 249.08,41
  Bottom 0.61: VR2.2 231.98,21.48 | D15.A 182.15,58.66 KK5.B2,8 KK5.A2,8 | D19.A 228,59.28 228,62.19 226.89,63.3 218.3,63.3
  Bottom 0.813: D8.A D15.A 187.61,60.48 186.31,61.78 C14.- 208.7,63.3 210,62 210,54 208,52 208,39 209,38 213,38 214,39 214,40 | 254.62,45.5 257.24,48.31 257.56,48.62 IC4.4 | 221.96,2.94 223.61,2.98 X2.2 | 248.66,75.17 KK6.B2,8 248.7,80 249,80 | C19.2 256.08,79.92 256,80 | 253,80 249,80 | C17.- 252.87,80.13 253,80 | 256,80 257,80 257,92.05 P2.S 254.46,92 258,92 260.59,94.59 P2.E | 256,80 253,80 | C16.- 252.97,67.97 252,67 246.64,67 C13.- | KK4.A2,8 223.3,84 223.17,84.13 | 248.7,82 KK4.B2,8 248.7,95.45 246.16,98 229,98 223.3,92.3 | 248.7,82 248.7,80.3 249,80 | IC3.GND 235.67,80.67 237,82 248.7,82 | 214,40 214,51 217,54 217,62 218,63 218.1,63.1 218.11,63.1 218.25,63.24 218.3,63.3 | C15.- 214.27,40.27 214,40 | IC4.8 249.08,41 | 256.43,35.57 255.43,35.57 254,37 245,37 244,38 239.38,38 R40.A
  Bottom 1.016: 234.54,15.03 VR2.3
  Bottom 1.27: VR2.2 VR2.3
  Bottom 1.422: C11.- 223.3,79.57 KK6.A2,8 KK4.A2,8 223.3,92.3
  Bottom 1.778: v227.56,14.57 235,14.57 | 235,14.57 236.38,14.57 v236.49,14.46 | 234.54,15.03 235,14.57
  pour Bottom (isolate 1.27): 178,0 268,0 268,100 153,100 153,42 178,42
GND2  (via drill 2.2)
  Bottom 0.406: 71.08,108.15 D36.K 74.94,114.94 76,116 76,118 73,121 73,123.94 C30.- 72.72,128.23 C22.- | 71.08,108.15 LED3.K | 71.08,108.15 71.08,106.92 71.97,105.94 78.96,105.93 78.96,106.94 | 80.59,109.28 X3.2 | 117.5,120.95 115.11,120.95 113.43,122.63 C28.- 113.43,139.57 | 117.5,120.95 R54.2 | T3.1 117.5,116.85 117.5,120.95 | IC6.8 111.58,145 111.62,144.95 111.62,149.5 | VR3.2 | R60.S 94.46,151.54 R60.A 94.46,146 105.08,146 106.08,145
  Bottom 0.61: VR3.2 88.98,125.48 | D27.A 39.15,162.66 KK8.B2,8 KK8.A2,8 | D31.A 85,163.28 85,166.19 83.89,167.3 75.3,167.3
  Bottom 0.813: D25.A D27.A 44.61,164.48 43.31,165.78 C24.- 65.7,167.3 67,166 67,158 65,156 65,143 66,142 70,142 71,143 71,144 | 111.62,149.5 114.24,152.31 114.56,152.62 IC6.4 | 78.96,106.94 80.61,106.98 X3.2 | 105.66,179.17 KK9.B2,8 105.7,184 106,184 | C29.2 113.08,183.92 113,184 | 110,184 106,184 | C27.- 109.87,184.13 110,184 | 113,184 114,184 114,196.05 P3.S 111.46,196 115,196 117.59,198.59 P3.E | 113,184 110,184 | C26.- 109.97,171.97 109,171 103.64,171 C23.- | KK7.A2,8 80.3,188 80.17,188.13 | 105.7,186 KK7.B2,8 105.7,199.45 103.16,202 86,202 80.3,196.3 | 105.7,186 105.7,184.3 106,184 | IC5.GND 92.67,184.67 94,186 105.7,186 | 71,144 71,155 74,158 74,166 75,167 75.11,167.1 75.25,167.24 75.25,167.25 75.3,167.3 | C25.- 71.27,144.27 71,144 | IC6.8 106.08,145 | 113.43,139.57 112.43,139.57 111,141 102,141 101,142 96.38,142 R60.A
  Bottom 1.016: 91.54,119.03 VR3.3
  Bottom 1.27: VR3.2 VR3.3
  Bottom 1.422: C21.- 80.3,183.57 KK9.A2,8 KK7.A2,8 80.3,196.3
  Bottom 1.778: v84.56,118.57 92,118.57 | 92,118.57 93.38,118.57 v93.49,118.47 | 91.54,119.03 92,118.57
  pour Bottom (isolate 1.27): 35,104 125,104 125,204 10,204 10,146 35,146
GND3  (via drill 2.2)
  Bottom 0.406: 214.08,108.15 D48.K 217.94,114.94 219,116 219,118 216,121 216,123.94 C40.- 215.72,128.23 C32.- | 214.08,108.15 LED4.K | 214.08,108.15 214.08,106.92 214.97,105.94 221.96,105.93 221.96,106.94 | 223.59,109.28 X4.2 | 260.5,120.95 258.11,120.95 256.43,122.63 C38.- 256.43,139.57 | 260.5,120.95 R74.2 | T4.1 260.5,116.85 260.5,120.95 | IC8.8 254.58,145 254.62,144.95 254.62,149.5 | VR4.2 | R80.S 237.46,151.54 R80.A 237.46,146 248.08,146 249.08,145
  Bottom 0.61: VR4.2 231.98,125.48 | D39.A 182.15,162.66 KK11.B2,8 KK11.A2,8 | D43.A 228,163.28 228,166.19 226.89,167.3 218.3,167.3
  Bottom 0.813: D37.A D39.A 187.61,164.48 186.31,165.78 C34.- 208.7,167.3 210,166 210,158 208,156 208,143 209,142 213,142 214,143 214,144 | 254.62,149.5 257.24,152.31 257.56,152.62 IC8.4 | 221.96,106.94 223.61,106.98 X4.2 | 248.66,179.17 KK12.B2,8 248.7,184 249,184 | C39.2 256.08,183.92 256,184 | 253,184 249,184 | C37.- 252.87,184.13 253,184 | 256,184 257,184 257,196.05 P4.S 254.46,196 258,196 260.59,198.59 P4.E | 256,184 253,184 | C36.- 252.97,171.97 252,171 246.64,171 C33.- | KK10.A2,8 223.3,188 223.17,188.13 | 248.7,186 KK10.B2,8 248.7,199.45 246.16,202 229,202 223.3,196.3 | 248.7,186 248.7,184.3 249,184 | IC7.GND 235.67,184.67 237,186 248.7,186 | 214,144 214,155 217,158 217,166 218,167 218.1,167.1 218.11,167.1 218.25,167.24 218.25,167.25 218.3,167.3 | C35.- 214.27,144.27 214,144 | IC8.8 249.08,145 | 256.43,139.57 255.43,139.57 254,141 245,141 244,142 239.38,142 R80.A
  Bottom 1.016: 234.54,119.03 VR4.3
  Bottom 1.27: VR4.2 VR4.3
  Bottom 1.422: C31.- 223.3,183.57 KK12.A2,8 KK10.A2,8 223.3,196.3
  Bottom 1.778: v227.56,118.57 235,118.57 | 235,118.57 236.38,118.57 v236.49,118.47 | 234.54,119.03 235,118.57
  pour Bottom (isolate 1.27): 178,104 268,104 268,204 153,204 153,146 178,146
N$1  (via drill 1 pad 2.18)
  other vias: 86.48,21.49
N$2  (via drill 1)
  other vias: 86.5,21.5
N$3
  Bottom 0.813: C3.+ 79.72,28.62 D5.A 80,28.86 | VR1.1 81.52,21.48 80,23 80,28.86 | 80,28.86 83.02,28.86 R2.1 84,35.32 84,48 93,57 93,66 87,72 87,83 89.76,85.76 IC1-LM317-VOLTAGE_REGULATOR.1
N$4  (1 unrouted)
  Bottom 0.813: D2.A 58,53.99 58,54 | 54.77,53.99 D1.C
  Bottom 1.676: D2.A 60,53.99 | 54.77,53.99 58,53.99 60,53.99 | 60,53.99 60,42 62,40 62,18 58,18
N$5  (1 unrouted)
  Bottom 0.813: D3.C
  Bottom 1.676: D4.A D3.C | D3.C 53.76,58.67 51.99,58.67 51,57.68 51,52 54.11,48.89 54.11,32.89 54,32.89 54,13 58,13
N$6
  Bottom 1.422: S1.1 20.16,83.14 R3.1
N$7
  Bottom 1.422: S1.2 22.7,81.87 R4.1
N$8
  Bottom 1.422: S1.3 25.24,80.6 R5.1
N$9  (1 unrouted)
  Bottom 1.676: INPUT1.2 20.3,5.3 23,8 23,16 25,18 31,18
N$10
  Bottom 0.813: LED2.A 66,6.66 66,30.64 R1.2
N$11
  Bottom 1.422: S1.4 R6.1
N$12
  Top 0.406: 85,9 93.49,9 93.49,11.64 93.5,11.64 93.5,20.02 84.49,20.02 84.49,16.33 84.5,16.33 84.5,8.99 84.98,8.99
N$13
  Bottom 2.54: TR1.1 15.72,37.9 F1.2
N$14
  Bottom 1.422: S1.5 30.32,81.87 R7.1
N$15
  Bottom 1.422: S1.6 32.86,85.68 R8.1
N$16
  Bottom 0.813: S1.7 35.4,86.95
  Bottom 1.422: 35.4,86.95 R9.1
N$17
  Bottom 0.406: 93,10.68 97.3,14.98
  Bottom 0.61: K1.O 96.75,29.25
  Bottom 0.813: D6.A 95.87,59.29 D7.C 96.22,58.94 96.22,57.22 88,49 88,40 | 96.75,29.25 94.36,29.25 | D5.C 90.5,29.25 94.36,29.25 | K1.P 105.52,29 | 94.36,29.25 R2.2 94.36,33.64 88,40 | D6.A C4.+ | D6.A 95.87,66.34 90.13,72.09 IC1.IN 90.13,83.13 92,85 92,93.07 IC1-LM317-VOLTAGE_REGULATOR.2 | D11.C 92.26,6.26 93,7 93,10.68 | 97.3,14.98 105.5,14.98 105.52,15 | 88,40 86.05,40 C5.+
  Bottom 1.27: K1.O 105.52,29.25 105.52,29 105.52,15 K1.1
N$18
  Bottom 0.813: R4.2 20,71.71 | R5.2 24,71.71 | R6.2 28,70.44 | R7.2 31.55,70.44 | 25.89,67.79 26,67.9
  Bottom 1.422: R9.2 R8.2 31.55,67.9 | 31.55,67.9 28,67.9 | 28,67.9 26,67.9 24,67.9 | 24,67.9 20,67.9 | 20,67.9 16.35,67.9 R3.2 | 20,71.71 20,67.9 | 24,71.71 24,67.9 | 28,70.44 28,67.9 | 31.55,70.44 31.55,67.9 | IC1-LM317-CURRENT_REGULATOR.2 25.89,67.79
N$19
  Bottom 2.54: F1.1 15.35,11.58 13.62,9.85 13.62,5.32 INPUT1.1
N$20
  Bottom 0.813: IC1-LM317-VOLTAGE_REGULATOR.3 94.84,95.16 94,96 89,96 87,94 87,86 85,84 85,70 83,68
  Bottom 1.016: 43,68 51,68 52,69 52,76 50,78 | 58,78 56,76 56,69 57,68 83,68
  Bottom 1.422: IC1-LM317-CURRENT_REGULATOR.1 23.35,65.02 14.98,65.02 14,66 14,83 17,86 17,89.79 20.16,92.95 S1.16 | S1.10 37.84,95.84 38,96 42,92 42,69 43,68 | 50,78 50,81 52,83 56,83 58,81 58,78
  Bottom 1.676: S1.10 S1.11 S1.12 S1.13 S1.14 S1.15 S1.16
N$21
  Bottom 0.61: C6.+ 112.01,71.72 112,71.72 112,72 110.55,72 110.54,71.98 C9.1
  Bottom 0.813: 112,71.9 112,63 110.61,61.61 R10.1 110.61,58.39 112,57 112,52 111,51 106,51 105,50 105,44 105.46,43.54 IC2.7 | 112,71.9 C6.+ | IC1.OUT 99.21,78.79 101,77 101,73 103,71 108,71 109,72 111.9,72 112,71.9
N$23
  Bottom 0.406: R10.2 118.58,60
  Bottom 0.61: R10.2 120,60 122.42,62.42 122.42,87.42 124,89 124,96 123,97 110,97 109,96 109,91 112,88 112,83.29 C7.+
  Bottom 0.813: D9.A 118.58,54.43 R13.2
  Bottom 1.27: 118.58,60 D9.A
N$24
  Bottom 1.422: D9.C D10.A
N$25
  Bottom 0.406: D10.C 118.53,64.32
  Bottom 1.27: 118.53,64.32 R12.1
N$26
  Bottom 0.813: R12.2 118.54,88.54 119,89 119.01,89 119.52,89.51 P1.A
N$27  (via drill 1)
  other vias: 91.5,21.5
N$28
  Bottom 0.813: D2.C D4.C 70.39,65.19 70,65.58 D6.C | 43.23,65 C2.+ 43.81,65.58 | 70.41,53.98 D2.C | R1.1 67.92,51.52 D2.C | 53.97,65.61 54,65.58
  Bottom 1.016: 70,65.58 54,65.58 43.81,65.58 | C1.+ 53.97,65.61
  Bottom 1.422: IC1-LM317-CURRENT_REGULATOR.3 28.43,65.04 38,65 43.23,65
N$29
  Bottom 0.406: 117.32,45.02 R13.1
  Bottom 0.813: R21.2 117.32,45.02 | R13.1 116.18,46.08 IC2.3
N$30
  Bottom 0.813: R14.1 117.97,26.97 122,31 122,51 | 122,51 120.04,51 R21.1 | IC2.6 109.08,46.08 114,51 122,51
N$31
  Bottom 0.406: 110.36,16.95 R15.1 | R14.2
  Bottom 0.813: R15.1 R14.2 | 110.36,16.95 110.36,15.51 111.11,14.76 T1.2
N$32
  Bottom 0.406: T1.3 113.15,12.85 | 120.54,10 R16.2
  Bottom 0.61: 113.15,12.85 116,10
  Bottom 0.813: 116,10 118,10 | 118,10 120.54,10 | D12.K 118,10
N$33
  Bottom 0.813: R16.1 113.53,9.56 115.46,7.63 D12.A 115.22,4 100,4 99.19,4.81 D11.A 99,6.45 99,8 97.9,9.1 K1.2
N$34
  Bottom 0.406: X1.1 75.51,6.29 | 101,12 96,12 95,11 95,5
  Bottom 0.61: R19.1 R18.1 106.79,35.59 K1.S 106.81,35.59 108.71,33.69 108.71,31 108.6,30.89 108.6,8.6
  Bottom 0.813: 75.51,6.29 79.24,10 80.37,10 81.15,10.01 | 81.15,10.01 R20.1 79.48,13.04 79.48,14.79 76.28,18 C10.+ | 108.6,8.6 108.6,7.6 107,6 103,6 102,7 102,11 101,12 | 95,5 94,4 87,4 86,5 86,9 85,10 81.16,10 81.15,10.01
N$35
  Bottom 0.406: 116,34.01 R18.2
  Bottom 0.61: C8.+ 115.97,30.61 R19.2
  Bottom 0.813: R18.2 R19.2 | R11.E 104.08,39.92 105,39 118,39 | 116,34.01 117.01,34.01 118,35 118,39 | 118,39 118,42.08 116.53,43.55 IC2.2
N$36
  Bottom 0.406: R20.2 70.64,13.04 D13.A
N$37
  Top 0.406: 84.5,14.52 93.5,14.52
N$38  (via drill 1 pad 2.18)
  other vias: 88.99,21.52
N$39  (via drill 1 pad 2.18)
  other vias: 91.5,21.45
N$41  (1 unrouted)
  Bottom 0.813: D14.A 201,53.99 201,54 | 197.77,53.99 D8.C
  Bottom 1.676: D14.A 203,53.99 | 197.77,53.99 201,53.99 203,53.99 | 203,53.99 203,42 205,40 205,18 201,18
N$42  (1 unrouted)
  Bottom 0.813: D15.C
  Bottom 1.676: D16.A D15.C | D15.C 196.76,58.67 194.99,58.67 194,57.68 194,52 197.11,48.89 197.11,32.89 197,32.89 197,13 201,13
N$43
  Bottom 0.813: C12.+ 222.72,28.62 D18.A 223,28.86 | VR2.1 224.52,21.48 223,23 223,28.86 | 223,28.86 226.02,28.86 R17.1 227,35.32 227,48 236,57 236,66 230,72 230,83 232.76,85.76 IC1-LM317-VOLTAGE_REGULATOR1.1
N$44
  Bottom 0.813: D14.C D16.C 213.39,65.19 213,65.58 D17.C | 186.23,65 C14.+ 186.81,65.58 | 213.41,53.98 D14.C | R29.1 210.92,51.52 D14.C | 196.97,65.61 197,65.58
  Bottom 1.016: 213,65.58 197,65.58 186.81,65.58 | C11.+ 196.97,65.61
  Bottom 1.422: IC1-LM317-CURRENT_REGULATOR1.3 171.43,65.04 181,65 186.23,65
N$45  (1 unrouted)
  Bottom 1.676: INPUT2.2 163.3,5.3 166,8 166,16 168,18 174,18
N$46
  Bottom 2.54: TR2.1 158.72,37.9 F2.2
N$47
  Bottom 2.54: F2.1 158.35,11.58 156.62,9.85 156.62,5.32 INPUT2.1
N$48
  Bottom 1.422: S2.1 163.16,83.14 R22.1
N$49
  Bottom 1.422: S2.2 165.7,81.87 R23.1
N$50
  Bottom 1.422: S2.3 168.24,80.6 R24.1
N$51
  Bottom 1.422: S2.4 R25.1
N$52
  Bottom 1.422: S2.5 173.32,81.87 R26.1
N$53
  Bottom 1.422: S2.6 175.86,85.68 R27.1
N$54
  Bottom 0.813: S2.7 178.4,86.95
  Bottom 1.422: 178.4,86.95 R28.1
N$55
  Bottom 0.813: R23.2 163,71.71 | R24.2 167,71.71 | R25.2 171,70.44 | R26.2 174.55,70.44 | 168.89,67.79 169,67.9
  Bottom 1.422: R28.2 R27.2 174.55,67.9 | 174.55,67.9 171,67.9 | 171,67.9 169,67.9 167,67.9 | 167,67.9 163,67.9 | 163,67.9 159.35,67.9 R22.2 | 163,71.71 163,67.9 | 167,71.71 167,67.9 | 171,70.44 171,67.9 | 174.55,70.44 174.55,67.9 | IC1-LM317-CURRENT_REGULATOR1.2 168.89,67.79
N$56
  Bottom 0.813: IC1-LM317-VOLTAGE_REGULATOR1.3 237.84,95.16 237,96 232,96 230,94 230,86 228,84 228,70 226,68
  Bottom 1.016: 186,68 194,68 195,69 195,76 193,78 | 201,78 199,76 199,69 200,68 226,68
  Bottom 1.422: IC1-LM317-CURRENT_REGULATOR1.1 166.35,65.02 157.98,65.02 157,66 157,83 160,86 160,89.79 163.16,92.95 S2.16 | S2.10 180.84,95.84 181,96 185,92 185,69 186,68 | 193,78 193,81 195,83 199,83 201,81 201,78
  Bottom 1.676: S2.10 S2.11 S2.12 S2.13 S2.14 S2.15 S2.16
N$57
  Bottom 0.813: LED1.A 209,6.66 209,30.64 R29.2
N$58
  Bottom 0.61: C16.+ 255.01,71.72 255,71.72 255,72 253.55,72 253.54,71.98 C19.1
  Bottom 0.813: 255,71.9 255,63 253.61,61.61 R30.1 253.61,58.39 255,57 255,52 254,51 249,51 248,50 248,44 248.46,43.54 IC4.7 | 255,71.9 C16.+ | IC3.OUT 242.21,78.79 244,77 244,73 246,71 251,71 252,72 254.9,72 255,71.9
N$59
  Bottom 0.406: R30.2 261.58,60
  Bottom 0.61: R30.2 263,60 265.42,62.42 265.42,87.42 267,89 267,96 266,97 253,97 252,96 252,91 255,88 255,83.29 C17.+
  Bottom 0.813: D20.A 261.58,54.43 R32.2
  Bottom 1.27: 261.58,60 D20.A
N$60
  Bottom 1.422: D20.C D21.A
N$61
  Bottom 0.406: D21.C 261.53,64.32
  Bottom 1.27: 261.53,64.32 R31.1
N$62
  Bottom 0.813: R31.2 261.54,88.54 262,89 262.01,89 262.52,89.51 P2.A
N$63
  Bottom 0.406: 260.32,45.02 R32.1
  Bottom 0.813: R39.2 260.32,45.02 | R32.1 259.18,46.08 IC4.3
N$64
  Bottom 0.813: R33.1 260.97,26.97 265,31 265,51 | 265,51 263.04,51 R39.1 | IC4.6 252.08,46.08 257,51 265,51
N$65
  Bottom 0.406: R34.1 | R33.2
  Bottom 0.813: R34.1 R33.2 | R34.1 253.36,15.51 254.11,14.76 T2.2
N$66
  Bottom 0.406: T2.3 256.15,12.85 | 263.54,10 R35.2
  Bottom 0.61: 256.15,12.85 259,10
  Bottom 0.813: 259,10 261,10 | 261,10 263.54,10 | D23.K 261,10
N$67
  Bottom 0.813: R35.1 256.53,9.56 258.46,7.63 D23.A 258.22,4 243,4 242.19,4.81 D22.A 242,6.45 242,8 240.9,9.1 K2.2
N$68
  Bottom 0.406: X2.1 218.51,6.29 | 244,12 239,12 238,11 238,5
  Bottom 0.61: R37.1 R36.1 249.79,35.59 K2.S 249.81,35.59 251.71,33.69 251.71,31 251.6,30.89 251.6,8.6
  Bottom 0.813: 218.51,6.29 222.24,10 223.37,10 224.15,10.01 | 224.15,10.01 R38.1 222.48,13.04 222.48,14.79 219.28,18 C20.+ | 251.6,8.6 251.6,7.6 250,6 246,6 245,7 245,11 244,12 | 238,5 237,4 230,4 229,5 229,9 228,10 224.16,10 224.15,10.01
N$69
  Bottom 0.406: 259,34.01 R36.2
  Bottom 0.61: C18.+ 258.97,30.61 R37.2
  Bottom 0.813: R36.2 R37.2 | R40.E 247.08,39.92 248,39 261,39 | 259,34.01 260.01,34.01 261,35 261,39 | 261,39 261,42.08 259.53,43.55 IC4.2
N$70
  Bottom 0.406: R38.2 213.64,13.04 D24.A
N$71
  Bottom 0.406: 236,10.68 240.3,14.98
  Bottom 0.61: K2.O 239.75,29.25
  Bottom 0.813: D17.A 238.87,59.29 D19.C 239.22,58.94 239.22,57.22 231,49 231,40 | 239.75,29.25 237.36,29.25 | D18.C 233.5,29.25 237.36,29.25 | K2.P 248.52,29 | 237.36,29.25 R17.2 237.36,33.64 231,40 | D17.A C13.+ | D17.A 238.87,66.34 233.13,72.09 IC3.IN 233.13,83.13 235,85 235,93.07 IC1-LM317-VOLTAGE_REGULATOR1.2 | D22.C 235.26,6.26 236,7 236,10.68 | 240.3,14.98 248.5,14.98 248.52,15 | 231,40 229.05,40 C15.+
  Bottom 1.27: K2.O 248.52,29.25 248.52,29 248.52,15 K2.1
N$72  (via drill 1)
  other vias: 229.5,21.5
N$73  (via drill 1)
  other vias: 234.5,21.5
N$74
  Top 0.406: 224,9 232.49,9 232.49,11.64 232.5,11.64 232.5,20.02 223.49,20.02 223.49,16.33 223.5,16.33 223.5,8.99 223.98,8.99
N$75
  Top 0.406: 223.5,14.52 232.5,14.52
N$76  (via drill 1 pad 2.18)
  other vias: 229.48,21.49
N$77  (via drill 1 pad 2.18)
  other vias: 231.99,21.52
N$78  (via drill 1 pad 2.18)
  other vias: 234.5,21.45
N$80  (1 unrouted)
  Bottom 0.813: D26.A 58,157.99 58,158 | 54.77,157.99 D25.C
  Bottom 1.676: D26.A 60,157.99 | 54.77,157.99 58,157.99 60,157.99 | 60,157.99 60,146 62,144 62,122 58,122
N$81  (1 unrouted)
  Bottom 0.813: D27.C
  Bottom 1.676: D28.A D27.C | D27.C 53.76,162.67 51.99,162.67 51,161.68 51,156 54.11,152.89 54.11,136.89 54,136.89 54,117 58,117
N$82
  Bottom 0.813: C22.+ 79.72,132.62 D30.A 80,132.86 | VR3.1 81.52,125.48 80,127 80,132.86 | 80,132.86 83.02,132.86 R41.1 84,139.32 84,152 93,161 93,170 87,176 87,187 89.76,189.76 IC1-LM317-VOLTAGE_REGULATOR2.1
N$83
  Bottom 0.813: D26.C D28.C 70.39,169.19 70,169.58 D29.C | 43.23,169 C24.+ 43.81,169.58 | 70.41,157.98 D26.C | R49.1 67.92,155.52 D26.C | 53.97,169.61 54,169.58
  Bottom 1.016: 70,169.58 54,169.58 43.81,169.58 | C21.+ 53.97,169.61
  Bottom 1.422: IC1-LM317-CURRENT_REGULATOR2.3 28.43,169.04 38,169 43.23,169
N$84  (1 unrouted)
  Bottom 1.676: INPUT3.2 20.3,109.3 23,112 23,120 25,122 31,122
N$85
  Bottom 2.54: TR3.1 15.72,141.9 F3.2
N$86
  Bottom 2.54: F3.1 15.35,115.58 13.62,113.85 13.62,109.32 INPUT3.1
N$87
  Bottom 1.422: S3.1 20.16,187.14 R42.1
N$88
  Bottom 1.422: S3.2 22.7,185.87 R43.1
N$89
  Bottom 1.422: S3.3 25.24,184.6 R44.1
N$90
  Bottom 1.422: S3.4 R45.1
N$91
  Bottom 1.422: S3.5 30.32,185.87 R46.1
N$92
  Bottom 1.422: S3.6 32.86,189.68 R47.1
N$93
  Bottom 0.813: S3.7 35.4,190.95
  Bottom 1.422: 35.4,190.95 R48.1
N$94
  Bottom 0.813: R43.2 20,175.71 | R44.2 24,175.71 | R45.2 28,174.44 | R46.2 31.55,174.44 | 25.89,171.79 26,171.9
  Bottom 1.422: R48.2 R47.2 31.55,171.9 | 31.55,171.9 28,171.9 | 28,171.9 26,171.9 24,171.9 | 24,171.9 20,171.9 | 20,171.9 16.35,171.9 R42.2 | 20,175.71 20,171.9 | 24,175.71 24,171.9 | 28,174.44 28,171.9 | 31.55,174.44 31.55,171.9 | IC1-LM317-CURRENT_REGULATOR2.2 25.89,171.79
N$95
  Bottom 0.813: IC1-LM317-VOLTAGE_REGULATOR2.3 94.84,199.16 94,200 89,200 87,198 87,190 85,188 85,174 83,172
  Bottom 1.016: 43,172 51,172 52,173 52,180 50,182 | 58,182 56,180 56,173 57,172 83,172
  Bottom 1.422: IC1-LM317-CURRENT_REGULATOR2.1 23.35,169.02 14.98,169.02 14,170 14,187 17,190 17,193.79 20.16,196.95 S3.16 | S3.10 37.84,199.84 38,200 42,196 42,173 43,172 | 50,182 50,185 52,187 56,187 58,185 58,182
  Bottom 1.676: S3.10 S3.11 S3.12 S3.13 S3.14 S3.15 S3.16
N$96
  Bottom 0.813: LED3.A 66,110.66 66,134.64 R49.2
N$97
  Bottom 0.61: C26.+ 112.01,175.72 112,175.72 112,176 110.55,176 110.54,175.98 C29.1
  Bottom 0.813: 112,175.9 112,167 110.61,165.61 R50.1 110.61,162.39 112,161 112,156 111,155 106,155 105,154 105,148 105.46,147.54 IC6.7 | 112,175.9 C26.+ | IC5.OUT 99.21,182.79 101,181 101,177 103,175 108,175 109,176 111.9,176 112,175.9
N$98
  Bottom 0.406: R50.2 118.58,164
  Bottom 0.61: R50.2 120,164 122.42,166.42 122.42,191.42 124,193 124,200 123,201 110,201 109,200 109,195 112,192 112,187.29 C27.+
  Bottom 0.813: D32.A 118.58,158.43 R52.2
  Bottom 1.27: 118.58,164 D32.A
N$99
  Bottom 1.422: D32.C D33.A
N$100
  Bottom 0.406: D33.C 118.53,168.32
  Bottom 1.27: 118.53,168.32 R51.1
N$101
  Bottom 0.813: R51.2 118.54,192.54 119,193 119.01,193 119.52,193.51 P3.A
N$102
  Bottom 0.406: 117.32,149.03 R52.1
  Bottom 0.813: R59.2 117.32,149.03 | R52.1 116.18,150.08 IC6.3
N$103
  Bottom 0.813: R53.1 117.97,130.97 122,135 122,155 | 122,155 120.04,155 R59.1 | IC6.6 109.08,150.08 114,155 122,155
N$104
  Bottom 0.406: 110.36,120.95 R54.1 | R53.2
  Bottom 0.813: R54.1 R53.2 | 110.36,120.95 110.36,119.51 111.11,118.76 T3.2
N$105
  Bottom 0.406: T3.3 113.15,116.85 | 120.54,114 R55.2
  Bottom 0.61: 113.15,116.85 116,114
  Bottom 0.813: 116,114 118,114 | 118,114 120.54,114 | D35.K 118,114
N$106
  Bottom 0.813: R55.1 113.53,113.56 115.46,111.63 D35.A 115.22,108 100,108 99.19,108.81 D34.A 99,110.45 99,112 97.9,113.1 K3.2
N$107
  Bottom 0.406: X3.1 75.51,110.29 | 101,116 96,116 95,115 95,109
  Bottom 0.61: R57.1 R56.1 106.79,139.59 K3.S 106.81,139.59 108.71,137.69 108.71,135 108.6,134.88 108.6,112.6
  Bottom 0.813: 75.51,110.29 79.24,114 80.37,114 81.15,114.01 | 81.15,114.01 R58.1 79.48,117.04 79.48,118.79 76.28,122 C30.+ | 108.6,112.6 108.6,111.6 107,110 103,110 102,111 102,115 101,116 | 95,109 94,108 87,108 86,109 86,113 85,114 81.16,114 81.15,114.01
N$108
  Bottom 0.406: 116,138.01 R56.2
  Bottom 0.61: C28.+ 115.97,134.6 R57.2
  Bottom 0.813: R56.2 R57.2 | R60.E 104.08,143.92 105,143 118,143 | 116,138.01 117.01,138.01 118,139 118,143 | 118,143 118,146.08 116.53,147.55 IC6.2
N$109
  Bottom 0.406: R58.2 70.64,117.04 D36.A
N$110
  Bottom 0.406: 93,114.68 97.3,118.98
  Bottom 0.61: K3.O 96.75,133.25
  Bottom 0.813: D29.A 95.87,163.29 D31.C 96.22,162.94 96.22,161.22 88,153 88,144 | 96.75,133.25 94.36,133.25 | D30.C 90.5,133.25 94.36,133.25 | K3.P 105.52,133 | 94.36,133.25 R41.2 94.36,137.64 88,144 | D29.A C23.+ | D29.A 95.87,170.34 90.13,176.09 IC5.IN 90.13,187.13 92,189 92,197.07 IC1-LM317-VOLTAGE_REGULATOR2.2 | D34.C 92.26,110.26 93,111 93,114.68 | 97.3,118.98 105.5,118.98 105.52,119 | 88,144 86.05,144 C25.+
  Bottom 1.27: K3.O 105.52,133.25 105.52,133 105.52,119 K3.1
N$111  (via drill 1)
  other vias: 86.5,125.5
N$112  (via drill 1)
  other vias: 91.5,125.5
N$113
  Top 0.406: 85,113 93.49,113 93.49,115.64 93.5,115.64 93.5,124.02 84.49,124.02 84.49,120.33 84.5,120.33 84.5,112.99 84.98,112.99
N$114
  Top 0.406: 84.5,118.52 93.5,118.52
N$115  (via drill 1 pad 2.18)
  other vias: 86.48,125.49
N$116  (via drill 1 pad 2.18)
  other vias: 88.99,125.52
N$117  (via drill 1 pad 2.18)
  other vias: 91.5,125.45
N$119  (1 unrouted)
  Bottom 0.813: D38.A 201,157.99 201,158 | 197.77,157.99 D37.C
  Bottom 1.676: D38.A 203,157.99 | 197.77,157.99 201,157.99 203,157.99 | 203,157.99 203,146 205,144 205,122 201,122
N$120  (1 unrouted)
  Bottom 0.813: D39.C
  Bottom 1.676: D40.A D39.C | D39.C 196.76,162.67 194.99,162.67 194,161.68 194,156 197.11,152.89 197.11,136.89 197,136.89 197,117 201,117
N$121
  Bottom 0.813: C32.+ 222.72,132.62 D42.A 223,132.86 | VR4.1 224.52,125.48 223,127 223,132.86 | 223,132.86 226.02,132.86 R61.1 227,139.32 227,152 236,161 236,170 230,176 230,187 232.76,189.76 IC1-LM317-VOLTAGE_REGULATOR3.1
N$122
  Bottom 0.813: D38.C D40.C 213.39,169.19 213,169.58 D41.C | 186.23,169 C34.+ 186.81,169.58 | 213.41,157.98 D38.C | R69.1 210.92,155.52 D38.C | 196.97,169.61 197,169.58
  Bottom 1.016: 213,169.58 197,169.58 186.81,169.58 | C31.+ 196.97,169.61
  Bottom 1.422: IC1-LM317-CURRENT_REGULATOR3.3 171.43,169.04 181,169 186.23,169
N$123  (1 unrouted)
  Bottom 1.676: INPUT4.2 163.3,109.3 166,112 166,120 168,122 174,122
N$124
  Bottom 2.54: TR4.1 158.72,141.9 F4.2
N$125
  Bottom 2.54: F4.1 158.35,115.58 156.62,113.85 156.62,109.32 INPUT4.1
N$126
  Bottom 1.422: S4.1 163.16,187.14 R62.1
N$127
  Bottom 1.422: S4.2 165.7,185.87 R63.1
N$128
  Bottom 1.422: S4.3 168.24,184.6 R64.1
N$129
  Bottom 1.422: S4.4 R65.1
N$130
  Bottom 1.422: S4.5 173.32,185.87 R66.1
N$131
  Bottom 1.422: S4.6 175.86,189.68 R67.1
N$132
  Bottom 0.813: S4.7 178.4,190.95
  Bottom 1.422: 178.4,190.95 R68.1
N$133
  Bottom 0.813: R63.2 163,175.71 | R64.2 167,175.71 | R65.2 171,174.44 | R66.2 174.55,174.44 | 168.89,171.79 169,171.9
  Bottom 1.422: R68.2 R67.2 174.55,171.9 | 174.55,171.9 171,171.9 | 171,171.9 169,171.9 167,171.9 | 167,171.9 163,171.9 | 163,171.9 159.35,171.9 R62.2 | 163,175.71 163,171.9 | 167,175.71 167,171.9 | 171,174.44 171,171.9 | 174.55,174.44 174.55,171.9 | IC1-LM317-CURRENT_REGULATOR3.2 168.89,171.79
N$134
  Bottom 0.813: IC1-LM317-VOLTAGE_REGULATOR3.3 237.84,199.16 237,200 232,200 230,198 230,190 228,188 228,174 226,172
  Bottom 1.016: 186,172 194,172 195,173 195,180 193,182 | 201,182 199,180 199,173 200,172 226,172
  Bottom 1.422: IC1-LM317-CURRENT_REGULATOR3.1 166.35,169.02 157.98,169.02 157,170 157,187 160,190 160,193.79 163.16,196.95 S4.16 | S4.10 180.84,199.84 181,200 185,196 185,173 186,172 | 193,182 193,185 195,187 199,187 201,185 201,182
  Bottom 1.676: S4.10 S4.11 S4.12 S4.13 S4.14 S4.15 S4.16
N$135
  Bottom 0.813: LED4.A 209,110.66 209,134.64 R69.2
N$136
  Bottom 0.61: C36.+ 255.01,175.72 255,175.72 255,176 253.55,176 253.54,175.98 C39.1
  Bottom 0.813: 255,175.9 255,167 253.61,165.61 R70.1 253.61,162.39 255,161 255,156 254,155 249,155 248,154 248,148 248.46,147.54 IC8.7 | 255,175.9 C36.+ | IC7.OUT 242.21,182.79 244,181 244,177 246,175 251,175 252,176 254.9,176 255,175.9
N$137
  Bottom 0.406: R70.2 261.58,164
  Bottom 0.61: R70.2 263,164 265.42,166.42 265.42,191.42 267,193 267,200 266,201 253,201 252,200 252,195 255,192 255,187.29 C37.+
  Bottom 0.813: D44.A 261.58,158.43 R72.2
  Bottom 1.27: 261.58,164 D44.A
N$138
  Bottom 1.422: D44.C D45.A
N$139
  Bottom 0.406: D45.C 261.53,168.32
  Bottom 1.27: 261.53,168.32 R71.1
N$140
  Bottom 0.813: R71.2 261.54,192.54 262,193 262.01,193 262.52,193.51 P4.A
N$141
  Bottom 0.406: 260.32,149.03 R72.1
  Bottom 0.813: R79.2 260.32,149.03 | R72.1 259.18,150.08 IC8.3
N$142
  Bottom 0.813: R73.1 260.97,130.97 265,135 265,155 | 265,155 263.04,155 R79.1 | IC8.6 252.08,150.08 257,155 265,155
N$143
  Bottom 0.406: R74.1 | R73.2
  Bottom 0.813: R74.1 R73.2 | R74.1 253.36,119.51 254.11,118.76 T4.2
N$144
  Bottom 0.406: T4.3 256.15,116.85 | 263.54,114 R75.2
  Bottom 0.61: 256.15,116.85 259,114
  Bottom 0.813: 259,114 261,114 | 261,114 263.54,114 | D47.K 261,114
N$145
  Bottom 0.813: R75.1 256.53,113.56 258.46,111.63 D47.A 258.22,108 243,108 242.19,108.81 D46.A 242,110.45 242,112 240.9,113.1 K4.2
N$146
  Bottom 0.406: X4.1 218.51,110.29 | 244,116 239,116 238,115 238,109
  Bottom 0.61: R77.1 R76.1 249.79,139.59 K4.S 249.81,139.59 251.71,137.69 251.71,135 251.6,134.88 251.6,112.6
  Bottom 0.813: 218.51,110.29 222.24,114 223.37,114 224.15,114.01 | 224.15,114.01 R78.1 222.48,117.04 222.48,118.79 219.28,122 C40.+ | 251.6,112.6 251.6,111.6 250,110 246,110 245,111 245,115 244,116 | 238,109 237,108 230,108 229,109 229,113 228,114 224.16,114 224.15,114.01
N$147
  Bottom 0.406: 259,138.01 R76.2
  Bottom 0.61: C38.+ 258.97,134.6 R77.2
  Bottom 0.813: R76.2 R77.2 | R80.E 247.08,143.92 248,143 261,143 | 259,138.01 260.01,138.01 261,139 261,143 | 261,143 261,146.08 259.53,147.55 IC8.2
N$148
  Bottom 0.406: R78.2 213.64,117.04 D48.A
N$149
  Bottom 0.406: 236,114.68 240.3,118.98
  Bottom 0.61: K4.O 239.75,133.25
  Bottom 0.813: D41.A 238.87,163.29 D43.C 239.22,162.94 239.22,161.22 231,153 231,144 | 239.75,133.25 237.36,133.25 | D42.C 233.5,133.25 237.36,133.25 | K4.P 248.52,133 | 237.36,133.25 R61.2 237.36,137.64 231,144 | D41.A C33.+ | D41.A 238.87,170.34 233.13,176.09 IC7.IN 233.13,187.13 235,189 235,197.07 IC1-LM317-VOLTAGE_REGULATOR3.2 | D46.C 235.26,110.26 236,111 236,114.68 | 240.3,118.98 248.5,118.98 248.52,119 | 231,144 229.05,144 C35.+
  Bottom 1.27: K4.O 248.52,133.25 248.52,133 248.52,119 K4.1
N$150  (via drill 1)
  other vias: 229.5,125.5
N$151  (via drill 1)
  other vias: 234.5,125.5
N$152
  Top 0.406: 224,113 232.49,113 232.49,115.64 232.5,115.64 232.5,124.02 223.49,124.02 223.49,120.33 223.5,120.33 223.5,112.99 223.98,112.99
N$153
  Top 0.406: 223.5,118.52 232.5,118.52
N$154  (via drill 1 pad 2.18)
  other vias: 229.48,125.49
N$155  (via drill 1 pad 2.18)
  other vias: 231.99,125.52
N$156  (via drill 1 pad 2.18)
  other vias: 234.5,125.45
(copper drawn outside any net)
  shapes: Top circle x4

## Text on the board
Bottom: Paladin Enabling Technologies | Paladin Enabling Technologies | Battery Charger / Maintainer | Battery Charger / Maintainer | Paladin Enabling Technologies | Paladin Enabling Technologies | Battery Charger / Maintainer | Battery Charger / Maintainer